# EAGLE board fabftdi-mega8_v1.1 (EAGLE 8.2.2)
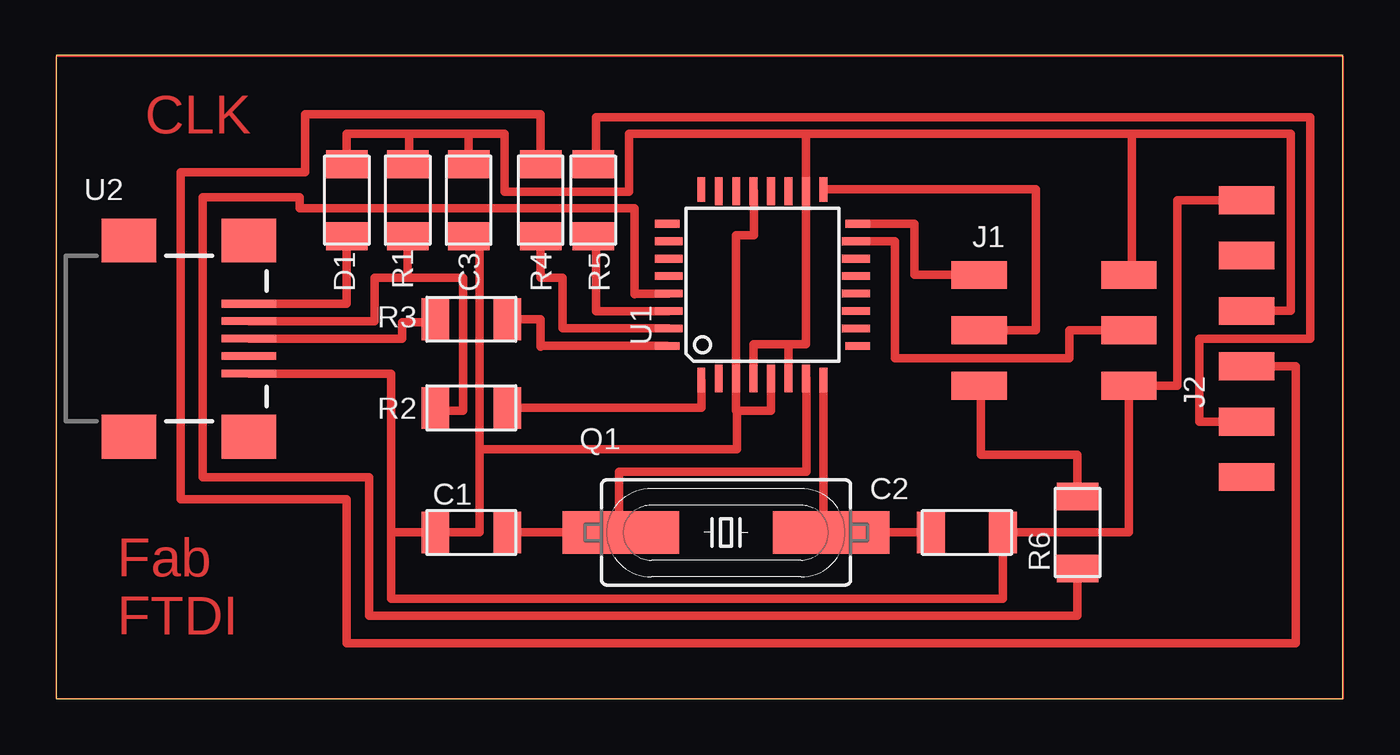
[diagram p0: board, top side]

Size 59.03 x 29.52 mm. Coordinates in mm from the lower left corner, seen from the top.
Outline: 0,0 59.03,0 59.03,29.52 0,29.52 0,0
Copper layers (1*16): Top 0.035mm / dielectric 1.5mm / Bottom 0.035mm
Design rules "default *": minimum track width 6mil, minimum drill 0.35mm, track to track 12mil, track to pad 10mil, pad to pad 10mil, via to via 6mil, smd to smd 8mil, copper to edge 40mil, drill to drill 6mil, minimum pad ring 10mil, minimum via ring 8mil, stop-mask expansion 4mil, vias tented up to drill 0mil, thermal gap 10mil

## Footprints (pad centres in the part's own frame; a part is rotated, then mirrored left to right if it is on the bottom)
C1206FAB = smd 1.27 x 1.905: 1 -1.651,0; 2 1.651,0
LED1206FAB = smd 1.27 x 1.905: 1 -1.651,0; 2 1.651,0
2X03SMD = smd 2.54 x 1.27: 1 -3.493,2.54; 2 3.365,2.54; 3 -3.493,0; 4 3.365,0; 5 -3.493,-2.54; 6 3.365,-2.54
1X06SMD = smd 2.54 x 1.27: 1 0,6.35; 2 0,3.81; 3 0,1.27; 4 0,-1.27; 5 0,-3.81; 6 0,-6.35
HC49UP = smd 5.334 x 1.93: 1 -4.826,0; 2 4.826,0
R1206FAB = smd 1.27 x 1.905: 1 -1.651,0; 2 1.651,0
TQFP32-08THIN = smd 1.118 x 0.356: 1 -4.369,2.8; 8 -4.369,-2.8; 17 4.369,-2.8; 24 4.369,2.8 | smd 1.27 x 0.356: 2 -4.293,2; 3 -4.293,1.2; 4 -4.293,0.4; 5 -4.293,-0.4; 6 -4.293,-1.2; 7 -4.293,-2; 18 4.293,-2; 19 4.293,-1.2; 20 4.293,-0.4; 21 4.293,0.4; 22 4.293,1.2; 23 4.293,2 | smd 0.356 x 1.118: 9 -2.8,-4.369; 16 2.8,-4.369; 25 2.8,4.369; 32 -2.8,4.369 | smd 0.356 x 1.27: 10 -2,-4.293; 14 1.2,-4.293; 15 2,-4.293; 26 2,4.293; 27 1.2,4.293; 31 -2,4.293 | smd 0.35 x 1.27: 11 -1.2,-4.293; 12 -0.4,-4.293; 13 0.4,-4.293; 28 0.4,4.293; 29 -0.4,4.293; 30 -1.2,4.293
USB_MINI = smd 2.5 x 0.35: D+ 3.77,0; D- 3.77,0.8; GND 3.77,-1.6; ID 3.77,-0.8; VBUS 3.77,1.6 | smd 2.5 x 2: SHIELD@1 -1.73,-4.5; SHIELD@2 -1.73,4.5; SHIELD@3 3.77,4.5; SHIELD@4 3.77,-4.5

## Placement (x,y rotation side)
C1  18p  [C1206FAB]  19.05,7.62 0 top
C2  18p  [C1206FAB]  41.78,7.62 180 top
C3  0.1u  [C1206FAB]  18.92,22.86 90 top
D1  Red  [LED1206FAB]  13.34,22.86 90 top
J1  ISP  [2X03SMD]  45.85,16.89 0 top
J2  FTDI-SMD-HEADER  [1X06SMD]  54.61,16.51 0 top
Q1  12MHz  [HC49UP]  30.73,7.62 0 top
R1  1k5  [R1206FAB]  16.13,22.86 90 top
R2  68  [R1206FAB]  19.05,13.34 0 top
R3  68  [R1206FAB]  19.05,17.4 0 top
R4  499  [R1206FAB]  22.23,22.86 90 top
R5  10k  [R1206FAB]  24.64,22.86 90 top
R6  0  [R1206FAB]  46.86,7.62 90 top
U1  ATmega8A-AU  [TQFP32-08THIN]  32.4,18.98 90 top
U2  USB_MINI  [USB_MINI]  5.08,16.51 0 top

## Library data of the parts
C1-C3 D1 J1 J2 R1-R6 U1 U2 = 00fab
Q1 = crystal; OC_FARNELL: unknown; OC_NEWARK: unknown

## Nets
D+: R3.2 U1.32
D-: R2.2 U1.1
GND: C1.1 C2.1 C3.1 J1.6 J2.1 U1.3 U1.5 U1.21 U2.GND
N$1: C2.2 Q1.2 U1.8
N$2: C1.2 Q1.1 U1.7
N$3: R4.1 U1.31
N$4: R5.1 U1.30
N$5: J1.1 U1.16
N$6: D1.1 U2.VBUS
N$7: R1.1 R2.1 U2.D-
N$8: R3.1 U2.D+
N$9: J1.3 U1.17
N$10: J1.4 U1.15
N$11: J2.4 R4.2
N$12: J1.5 R6.2
N$13: R6.1 U1.29
N$14: J2.5 R5.2
VCC: C3.2 D1.2 J1.2 J2.3 R1.2 U1.4 U1.6 U1.18

## Tracks (layer width: path | path; a pad name or v marks a point on that pad's centre or on a via)
D+
  Top 0.381: R3.2 22.23,17.4 22.23,16.13 22.23,16.18 U1.32
D-
  Top 0.381: U1.1 29.6,13.34 R2.2
GND
  Top 0.381: U1.21 32.02,23.27 32.02,21.26 31.2,21.26 U1.3 31.2,13.21 31.24,13.21 | C3.1 19.43,21.34 19.43,11.43 | 19.43,11.43 19.43,7.62 C1.1 15.37,7.62 | 31.24,13.21 31.24,11.43 19.43,11.43 | U2.GND 15.37,14.91 15.37,7.62 | 15.37,7.62 15.37,4.57 43.43,4.57 C2.1 49.21,7.62 J1.6 51.44,14.35 51.44,22.86 J2.1 | U1.5 32.8,13.21 31.24,13.21
N$1
  Top 0.381: C2.2 Q1.2 | 35.43,7.75 Q1.2 | Q1.2 35.2,7.62 U1.8
N$2
  Top 0.381: 25.82,7.62 Q1.1 26.04,7.75 | 25.82,7.62 C1.2 | 25.82,7.62 25.82,10.41 34.42,10.41 34.42,14.68 U1.7
N$3
  Top 0.381: R4.1 22.23,19.3 23.24,19.3 23.24,17.22 | 23.24,17.22 23.24,17.02 | U1.31 23.24,16.98 23.24,17.22
N$4
  Top 0.381: R5.1 24.77,21.21 24.77,17.78 U1.30
N$5
  Top 0.381: J1.1 39.37,19.43 39.37,21.78 U1.16
N$6
  Top 0.381: U2.VBUS 13.34,18.11 D1.1
N$7
  Top 0.381: U2.D- 14.61,17.31 14.61,19.3 16.13,19.3 | 16.13,19.3 R1.1 | 16.13,19.3 18.67,19.3 18.67,13.21 17.4,13.21 R2.1
N$8
  Top 0.381: U2.D+ 15.88,16.51 15.88,17.27 17.4,17.27 R3.1
N$9
  Top 0.381: J1.3 44.96,16.89 44.96,23.37 35.2,23.37 U1.17
N$10
  Top 0.381: J1.4 46.48,16.89 46.48,15.62 38.48,15.62 38.48,20.98 U1.15
N$11
  Top 0.381: R4.2 22.23,26.8 11.43,26.8 11.43,24.13 5.71,24.13 5.71,9.14 13.34,9.14 13.34,2.54 56.87,2.54 56.87,15.24 J2.4
N$12
  Top 0.381: J1.5 42.42,14.35 42.42,11.18 46.86,11.18 R6.2
N$13
  Top 0.381: R6.1 46.86,3.81 14.35,3.81 14.35,10.16 6.73,10.16 6.73,22.99 11.18,22.99 11.18,22.48 26.54,22.48 26.54,18.55 | 26.54,18.55 26.54,18.54 | U1.29 26.54,18.58 26.54,18.55
N$14
  Top 0.381: R5.2 24.77,24.51 24.77,26.67 57.53,26.67 57.53,16.51 52.45,16.51 52.45,12.7 J2.5
N$15
  Top 0.076: 0,0 59.05,0 59.05,29.46 0,29.46 0,0
VCC
  Top 0.381: D1.2 13.34,25.91 16.19,25.91 | 16.19,25.91 18.92,25.91 | 18.92,25.91 C3.2 | R1.2 16.19,24.51 16.19,25.91 | J1.2 49.35,19.43 49.35,25.91 | 34.41,25.91 49.35,25.91 | 34.41,25.91 U1.18 34.4,16.26 33.53,16.26 | 18.92,25.91 20.57,25.91 20.57,23.24 26.29,23.24 26.29,25.91 34.41,25.91 | 49.35,25.91 56.64,25.91 56.64,17.78 J2.3 | U1.4 32,16.26 33.53,16.26 | 33.53,16.26 33.6,16.26 U1.6

## Text on the board
Top: CLK | Fab / FTDI